# EAGLE board InstAmp (EAGLE 6.2)
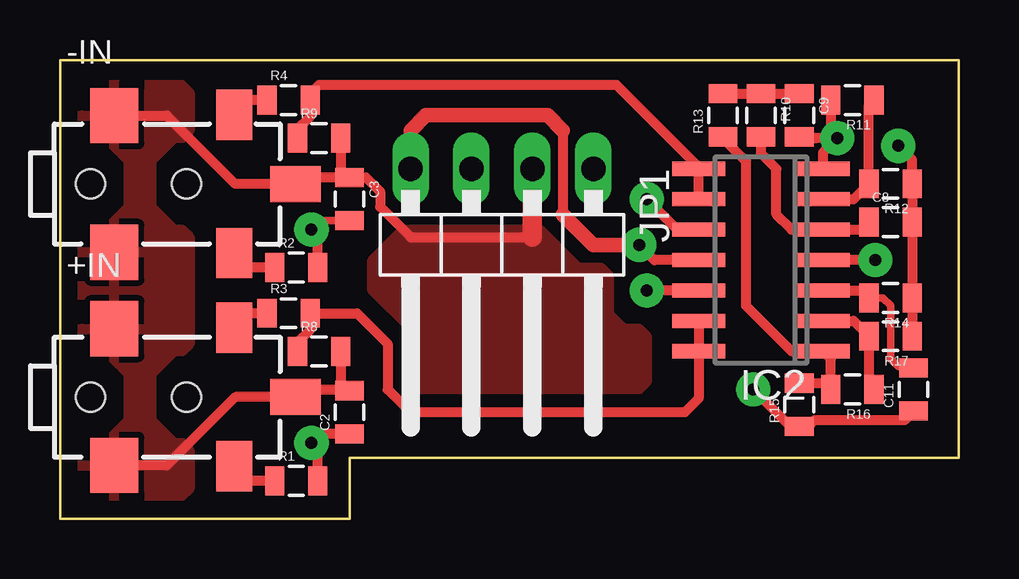
[diagram p0: board, top side]
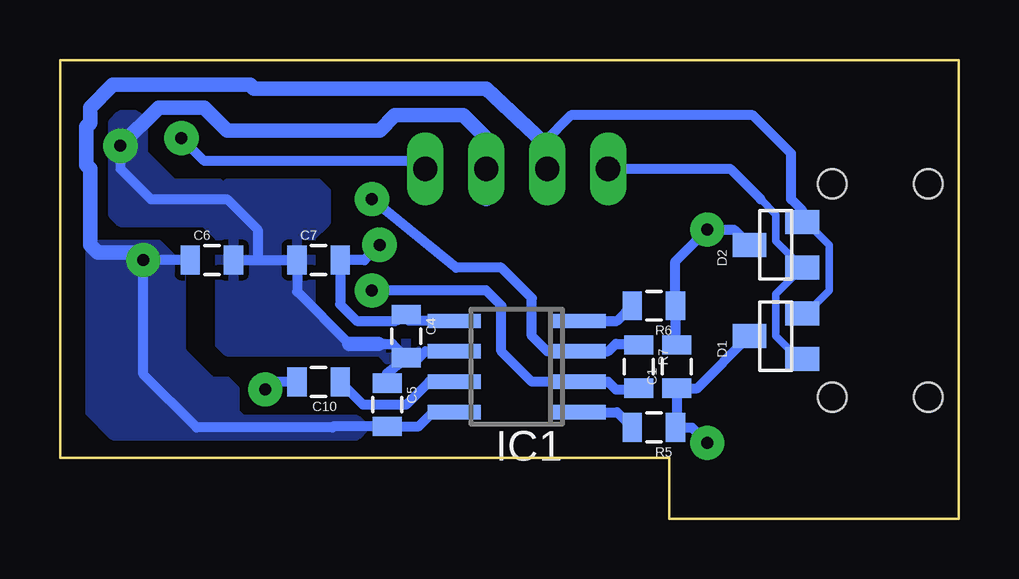
[diagram p1: board, bottom side, seen from below]

Size 37.45 x 19.14 mm. Coordinates in mm from the lower left corner, seen from the top.
Outline: 12.06,2.54 37.45,2.54 37.45,19.14 0,19.14 0,0 12.06,0 12.06,2.54
Copper layers (1*16): Top 0.035mm / dielectric 1.5mm / Bottom 0.035mm
Design rules: minimum track width 10mil, minimum drill 12mil, track to track 8mil, track to pad 8mil, pad to pad 8mil, via to via 8mil, smd to smd 8mil, copper to edge 20mil, drill to drill 8mil, minimum pad ring 10mil, minimum via ring 8mil, stop-mask expansion 4mil, vias tented up to drill 0mil, thermal gap 10mil

## Footprints (pad centres in the part's own frame; a part is rotated, then mirrored left to right if it is on the bottom)
AUDIOJACK2.5-SMD = smd 2 x 2.3: GND1 1,-2.85; GND2 1,2.85 | smd 1.5 x 2.1: L 6,-2.885; R 6,2.885 | smd 2.1 x 1.5: SW 8.55,0 | hole 1.2: 0,0; 4,0
0805 = smd 0.8 x 1.2: 1 -0.9,0; 2 0.9,0
SOT23 = smd 1 x 1.4: 1 -0.95,-1.1; 2 0.95,-1.1; 3 0,1.1
AD8221ARZ = smd 0.6 x 2.2: 1 -1.905,-2.6; 2 -0.635,-2.6; 3 0.635,-2.6; 4 1.905,-2.6; 5 1.905,2.6; 6 0.635,2.6; 7 -0.635,2.6; 8 -1.905,2.6
SO14 = smd 0.6 x 2.2: 1 -3.81,-2.6; 2 -2.54,-2.6; 3 -1.27,-2.6; 4 0,-2.6; 5 1.27,-2.6; 6 2.54,-2.6; 7 3.81,-2.6; 8 3.81,2.6; 9 2.54,2.6; 10 1.27,2.6; 11 0,2.6; 12 -1.27,2.6; 13 -2.54,2.6; 14 -3.81,2.6
1X04/90 = drill 1.016 long: 1 -3.81,-3.81; 2 -1.27,-3.81; 3 1.27,-3.81; 4 3.81,-3.81

## Placement (x,y rotation side)
+IN  AUDIOJACK2.5-SMD  [AUDIOJACK2.5-SMD]  1.27,5.08 0 top
-IN  AUDIOJACK2.5-SMD  [AUDIOJACK2.5-SMD]  1.27,13.97 0 top
C1  10pF  [0805]  11.75,6.35 90 bottom
C2  100pF  [0805]  12.06,4.45 90 top
C3  100pF  [0805]  12.06,13.34 270 top
C4  100nF  [0805]  23.02,7.62 270 bottom
C5  100nF  [0805]  23.81,4.76 270 bottom
C6  100nF  [0805]  31.11,10.8 0 bottom
C7  100nF  [0805]  26.67,10.8 0 bottom
C8  47nF  [0805]  34.61,12.38 0 top
C9  33nF  [0805]  30.8,16.83 270 top
C10  1uF  [0805]  26.67,5.71 180 bottom
C11  1uF  [0805]  35.56,5.4 90 top
D1  BAV199  [SOT23]  7.62,7.62 90 bottom
D2  BAV199  [SOT23]  7.62,11.43 90 bottom
IC1  AD8221ARZ  [AD8221ARZ]  18.41,6.35 90 bottom
IC2  TLC2254ID  [SO14]  29.21,10.8 90 top
JP1  OUT  [1X04/90]  18.41,10.8 180 top
R1  2k2  [0805]  9.84,1.59 0 top
R2  2k2  [0805]  9.84,10.48 0 top
R3  100  [0805]  9.53,8.57 0 top
R4  100  [0805]  9.53,17.46 0 top
R5  2k2  [0805]  12.7,3.81 180 bottom
R6  2k2  [0805]  12.7,8.89 180 bottom
R7  2k  [0805]  13.34,6.35 270 bottom
R8  100k  [0805]  10.79,6.99 0 top
R9  100k  [0805]  10.79,15.88 0 top
R10  100k  [0805]  29.21,16.83 270 top
R11  100k  [0805]  33.02,17.46 180 top
R12  100k  [0805]  34.61,13.97 180 top
R13  100k  [0805]  27.62,16.83 90 top
R14  100k  [0805]  34.61,9.21 180 top
R15  680k  [0805]  30.8,4.76 90 top
R16  910k  [0805]  33.02,5.4 180 top
R17  100k  [0805]  34.61,7.62 180 top

## Library data of the parts
+IN -IN IC1 = femtoexg
C1-C11 R1-R17 = SparkFun-Passives
D1 D2 = SparkFun-DiscreteSemi; PROD_ID: DIO-10647
IC2 = linear
JP1 = pinhead

## Nets
+5V: C5.2 C6.1 D1.2 D2.2 IC1.8 IC2.4 JP1.3
-5V: C4.1 C7.2 D1.1 D2.1 IC1.5 IC2.11 JP1.4
GND: +IN.GND1 +IN.GND2 +IN.SW -IN.GND1 -IN.GND2 -IN.SW C2.2 C3.1 C4.2 C5.1 C6.2 C7.1 C8.2 IC1.6 JP1.2 R8.2 R9.2 R12.1 R14.1 R17.1
N$1: +IN.L R1.1
N$2: -IN.R R4.1
N$3: +IN.R R3.1
N$4: -IN.L R2.1
N$5: C1.2 C3.2 D2.3 R2.2 R6.1
N$6: C1.1 C2.1 D1.3 R1.2 R5.1
N$7: IC2.8 IC2.9 R4.2 R9.1
N$8: IC1.3 IC2.10 R7.1
N$9: IC2.1 R13.1 R15.2 R16.2
N$10: IC2.2 R16.1 R17.2
N$11: C10.1 IC1.7
N$12: IC1.1 R5.2
N$13: IC1.4 R6.2
N$14: C8.1 IC2.5 R10.2
N$15: C9.1 R10.1 R13.2
N$16: IC1.2 IC2.12 R7.2
N$17: IC2.13 IC2.14 R3.2 R8.1
N$20: C10.2 C11.1 R15.1
N$22: C11.2 IC2.3 R14.2
N$23: IC2.6 R11.1 R12.2
OUT: C9.2 IC2.7 JP1.1 R11.2

## Tracks (layer width: path | path; a pad name or v marks a point on that pad's centre or on a via)
+5V  (via drill 0.5 pad 1.42)
  Top 0.406: v33.97,10.8 IC2.4
  Bottom 0.305: D2.2 6.35,12.38 5.4,11.43 5.4,9.53 6.35,8.57 D1.2
  Bottom 0.406: C6.1 v33.97,10.8 33.97,6.03 31.75,3.81 26.09,3.81 26.04,3.86 C5.2 22.49,3.86 21.91,4.45 IC1.8 | D2.2 6.52,12.87 6.99,13.34 6.99,15.24 8.57,16.83 16.16,16.83 17.29,15.7
  Bottom 0.61: JP1.3 17.14,15.56 17.29,15.7 19.68,17.94 29.37,17.94 29.53,18.1 35.24,18.1 36.2,17.14 36.2,16.51 36.35,16.35 36.35,14.76 36.2,14.61 36.2,11.43 35.88,11.11 34.29,11.11 v33.97,10.8
  pour Bottom: 25.08,3.49 24.77,3.81 25.08,4.13 29.84,4.13 30.16,4.45 30.16,5.4 30.48,5.71 31.11,5.71 32.38,6.99 32.38,10.48 33.34,11.43 35.88,11.43 36.2,11.11 36.2,4.45 35.24,3.49
-5V  (via drill 0.5 pad 1.42)
  Top 0.406: IC2.11 24.77,10.8 v24.13,11.43 | 20.95,16.19 20.95,12.7
  Top 0.61: JP1.4 14.61,16.19 15.24,16.83 20.32,16.83 20.95,16.19 | 20.95,12.7 22.23,11.43 v24.13,11.43
  Bottom 0.305: 6.67,6.67 7.62,7.62 7.62,9.38 D2.1 7.62,11.58 7.62,12.7 8.26,13.34
  Bottom 0.406: D1.1 6.67,6.67 | v24.13,11.43 24.77,10.8 C7.2 25.77,8.94 25.08,8.25 23.44,8.25 C4.1 22.91,8.25 IC1.5 | JP1.4 9.53,14.61 8.26,13.34
GND  (via drill 0.5 pad 1.42)
  Top 0.305: 11.7,14.61 C3.1 | 10.09,14.23 -IN.SW
  Top 0.406: 10.16,13.97 -IN.SW 7.3,13.97 4.45,16.82 -IN.GND2 | R9.2 11.7,14.61 | 10.09,14.23 C3.1 12.75,14.23 13.34,13.65 13.34,13.02 14.61,11.75 19.68,11.75 | R8.2 11.7,5.71 C2.2 12.01,5.4 10.48,5.4 10.16,5.08 +IN.SW 7.3,5.08 4.45,2.22 +IN.GND1 | R17.1 R14.1 C8.2 R12.1 35.51,14.98 v34.92,15.56
  Top 0.813: 19.68,11.75 JP1.2
  Bottom 0.406: C6.2 29.21,10.8 | 29.21,10.8 C7.1 27.57,9.47 25.4,7.3 | v34.92,15.56 34.92,14.61 33.66,13.34 30.48,13.34 29.21,12.07 29.21,10.8 | C5.1 23.81,6.08 C4.2 | 24.18,7.3 23.6,7.3 C4.2 | C4.2 22.49,6.72 22.23,6.99 IC1.6
  Bottom 0.61: 19.68,13.34 JP1.2 19.68,15.88 20.64,16.83 23.5,16.83 24.13,16.19 30.48,16.19 31.43,17.14 33.34,17.14 v34.92,15.56 | 25.4,7.3 24.18,7.3
  pour Top: 24.13,5.4 14.92,5.4 14.61,5.71 14.61,7.94 13.02,9.53 13.02,10.8 14.29,12.07 20,12.07 21.59,10.48 22.54,10.48 22.86,10.16 22.86,8.57 23.5,7.94 24.13,7.94 24.45,7.62 24.45,5.71
  pour Top: 0.95,17.46 1.59,18.1 5.08,18.1 5.4,17.78 5.4,16.19 5.08,15.88 4.76,15.88 3.81,14.92 3.81,13.02 4.76,12.07 5.08,12.07 5.4,11.75 5.4,7.3 5.08,6.99 4.76,6.99 3.81,6.03 3.81,4.13 4.76,3.17 5.08,3.17 5.4,2.86 5.4,1.27 5.08,0.95 1.27,0.95 0.95,1.27 0.95,2.86 1.27,3.17 1.91,3.17 2.86,4.13 2.86,6.03 1.91,6.99 1.27,6.99 0.95,7.3 0.95,11.75 1.27,12.07 1.91,12.07 2.86,13.02 2.86,14.92 1.91,15.88 1.27,15.88 0.95,16.19
  pour Bottom: 30.8,7.62 30.8,7.3 30.48,6.99 24.13,6.99 23.81,6.67 22.86,6.67 22.54,6.99 22.86,7.3 25.4,7.3 26.99,8.89 26.99,11.75 26.35,12.38 26.35,13.65 26.67,13.97 30.48,13.97 30.8,13.65
  pour Bottom: 30.8,13.97 32.7,13.97 33.97,15.24 33.97,16.51 34.29,16.83 34.92,16.83 35.24,16.51 35.24,12.7 34.92,12.38 31.43,12.38 30.8,11.75
N$1
  Top 0.406: R1.1 7.88,1.59 +IN.L
N$2
  Top 0.406: R4.1 7.88,17.46 -IN.R
N$3
  Top 0.406: R3.1 7.88,8.57 +IN.R
N$4
  Top 0.406: R2.1 7.88,10.48 -IN.L
N$5  (via drill 0.5 pad 1.42)
  Top 0.305: C3.2 10.85,12.43 v10.48,12.07
  Top 0.406: R2.2 10.74,11.8 v10.48,12.07
  Bottom 0.305: 11.8,7.3 C1.2
  Bottom 0.406: D2.3 9.36,12.07 v10.48,12.07 11.8,10.74 R6.1 11.8,7.3
N$6  (via drill 0.5 pad 1.42)
  Top 0.406: R1.2 10.74,2.91 v10.48,3.17 10.85,3.54 C2.1
  Bottom 0.305: 11.75,3.86 R5.1
  Bottom 0.406: R5.1 11.11,3.81 v10.48,3.17 | 11.75,3.86 C1.1 10.89,5.45 D1.3
N$7
  Top 0.305: R4.2 10.43,17.73
  Top 0.406: R4.2 10.43,16.77 9.89,16.25 R9.1 | 10.43,17.73 10.79,18.1 23.18,18.1 26.61,14.66 IC2.8 IC2.9
N$8  (via drill 0.5 pad 1.42)
  Top 0.406: IC2.10 25.72,12.07 v24.45,13.34
  Bottom 0.406: R7.1 13.39,7.3 14.29,7.3 14.61,6.99 IC1.3 17.14,6.99 17.78,7.62 17.78,9.21 19.05,10.48 20.95,10.48 v24.45,13.34
N$9
  Top 0.406: R13.1 27.62,15.88 28.57,14.92 28.57,8.89 30.48,6.99 IC2.1 32.12,6.67 R16.2 31.86,5.66 R15.2
N$10
  Top 0.406: IC2.2 33.07,8.25 R17.2 33.71,5.61 R16.1
N$11
  Bottom 0.406: IC1.7 22.07,5.71 23.02,4.76 24.82,4.76 C10.1
N$12
  Bottom 0.406: IC1.1 14.23,4.45 R5.2
N$13
  Bottom 0.406: IC1.4 14.23,8.25 R6.2
N$14
  Top 0.406: C8.1 33.39,12.07 IC2.5 30.48,12.07 29.84,12.7 29.84,14.61 29.21,15.24 R10.2
N$15
  Top 0.406: R13.2 R10.1 C9.1
N$16  (via drill 0.5 pad 1.42)
  Top 0.406: IC2.12 v24.45,9.53
  Bottom 0.406: R7.2 13.39,5.4 14.29,5.4 14.61,5.71 IC1.2 17.78,5.71 19.05,6.99 19.05,8.89 19.68,9.53 v24.45,9.53
N$17
  Top 0.406: R8.1 9.89,7.36 10.43,7.88 R3.2 12.38,8.57 13.65,7.3 13.65,5.4 14.61,4.45 26.04,4.45 26.61,5.02 IC2.14 IC2.13
N$20  (via drill 0.5 pad 1.42)
  Top 0.406: C11.1 35.19,4.13 31.43,4.13 31.17,3.86 R15.1 30.43,3.86 v28.89,5.4
  Bottom 0.406: C10.2 28.57,5.71 v28.89,5.4
N$22
  Top 0.305: R14.2 34.29,9.21 34.61,8.89 34.61,6.67 34.92,6.35 35.51,6.35 C11.2
  Top 0.406: IC2.3 33.39,9.53 R14.2
N$23
  Top 0.406: IC2.6 33.07,13.34 R12.2 33.71,17.25 R11.1
OUT  (via drill 0.5 pad 1.42)
  Top 0.406: v32.38,15.88 31.48,15.88 C9.2 | IC2.7 31.81,15.3 v32.38,15.88 | R11.2 32.12,16.14 v32.38,15.88
  Bottom 0.406: JP1.1 22.54,14.92 31.43,14.92 v32.38,15.88